# Altium PCB ЦТЕА4.324.039.PcbDoc
Units mm, origin at the board's own origin, x right, y up, seen from the top; angles counter-clockwise.
Board outline 257.3 x 114.8 mm, 4 copper layers (Top Layer, Mid-Layer 1, Internal Plane 1, Bottom Layer); 126 components, 114 nets, 540 pads, 119 vias.
Unrouted connection lines stored in the file: 21.
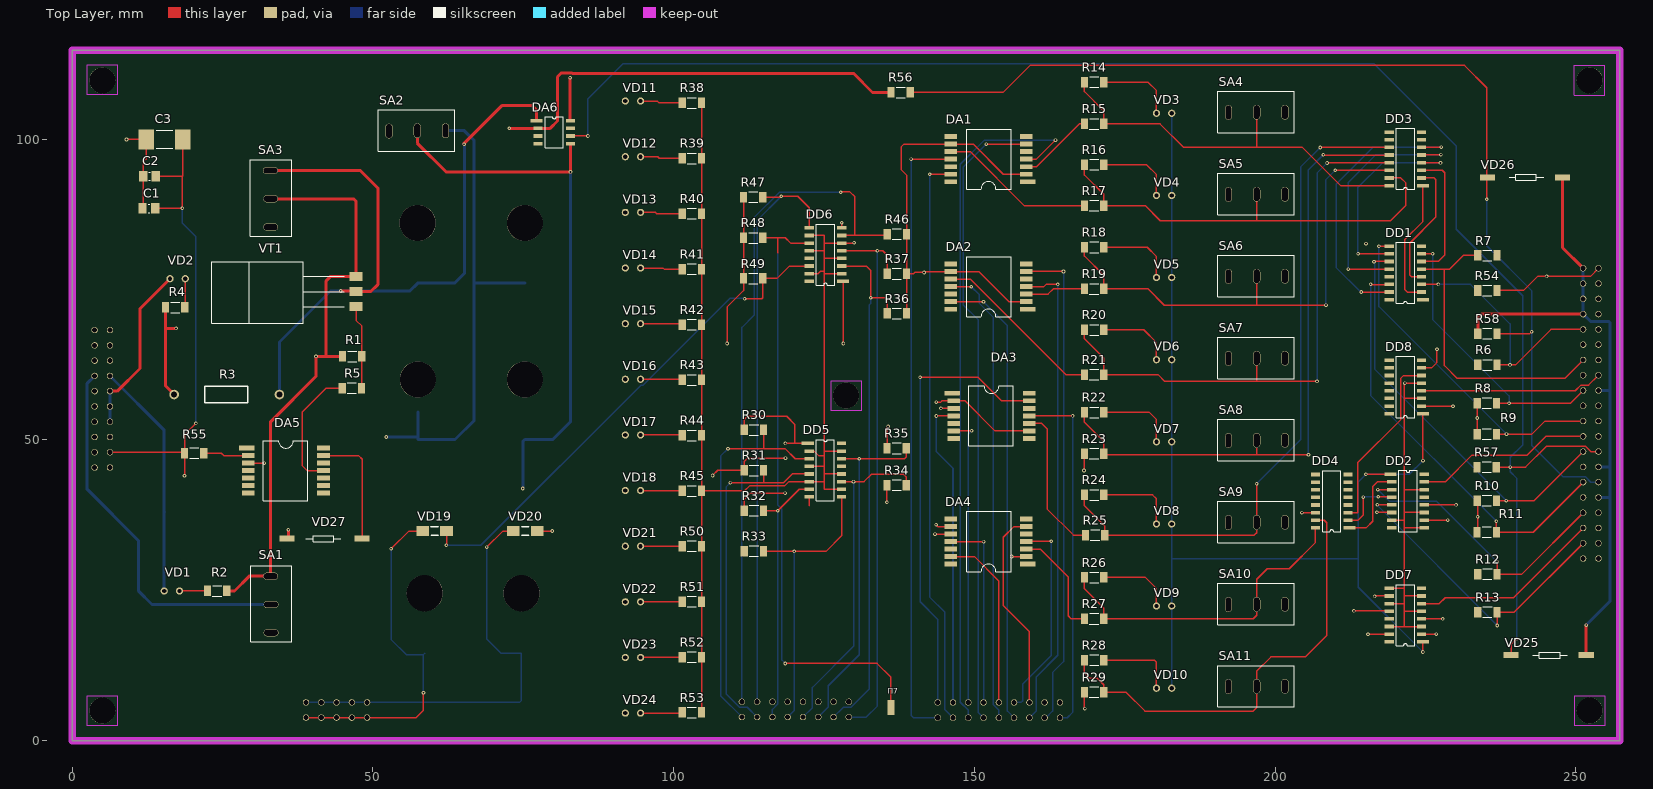
[diagram p0: Top Layer view]
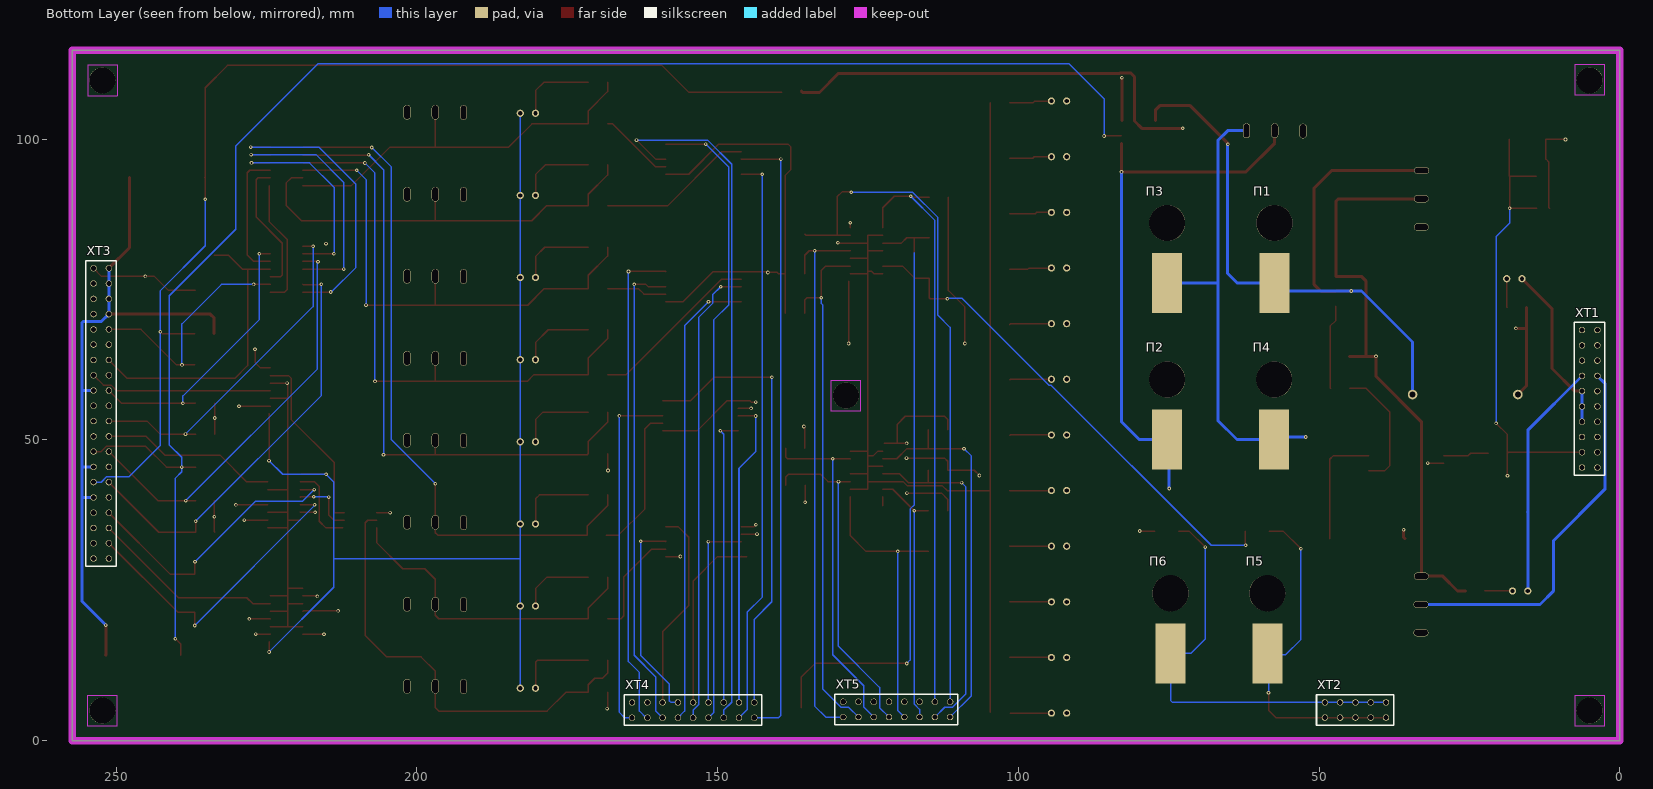
[diagram p1: Bottom Layer view, seen from below]
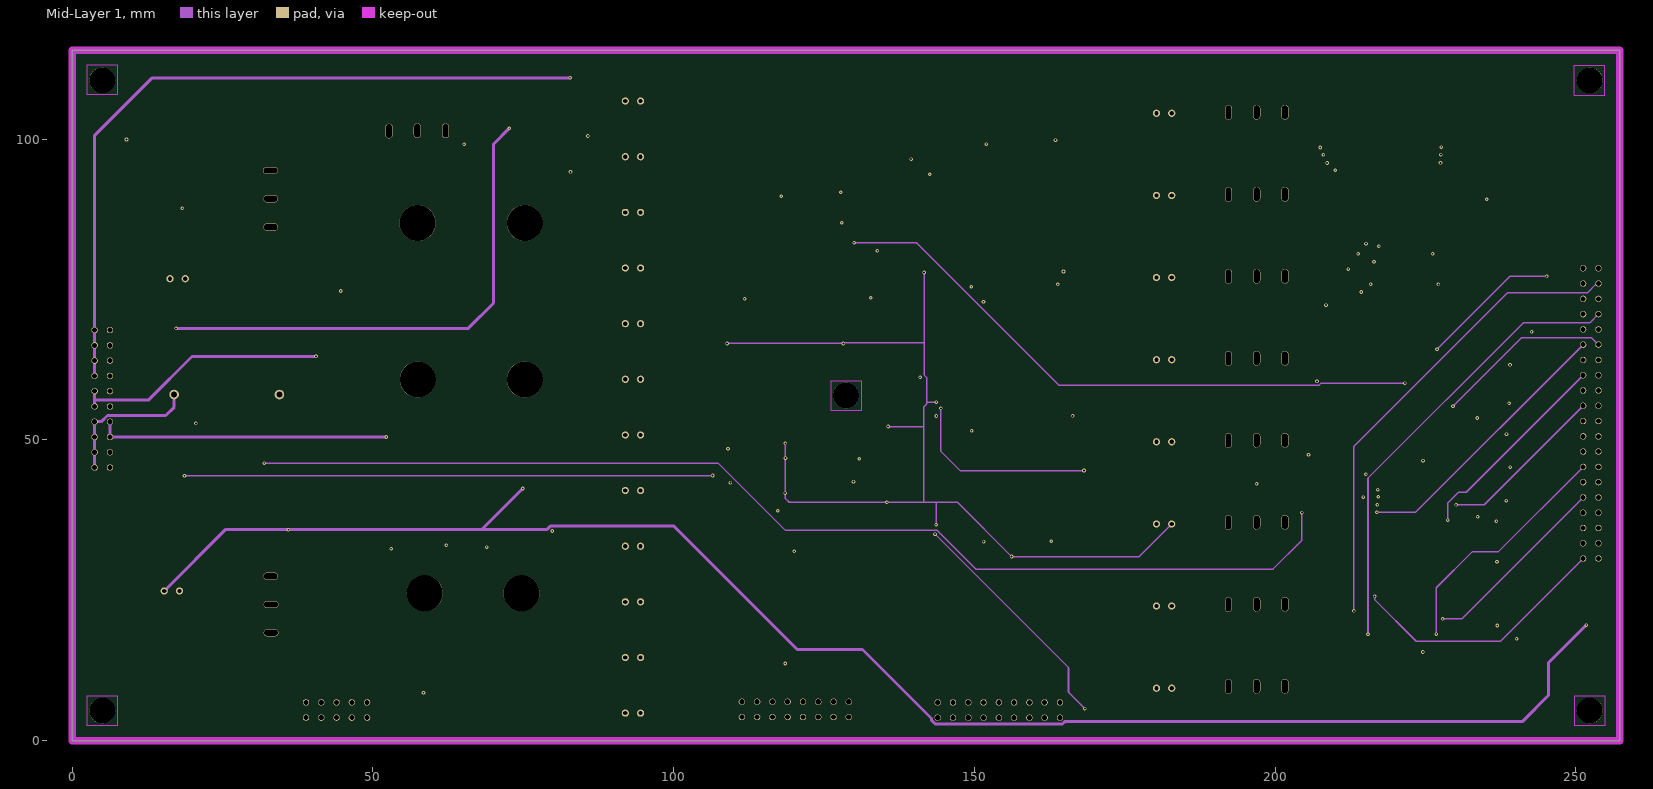
[diagram p2: Mid-Layer 1]
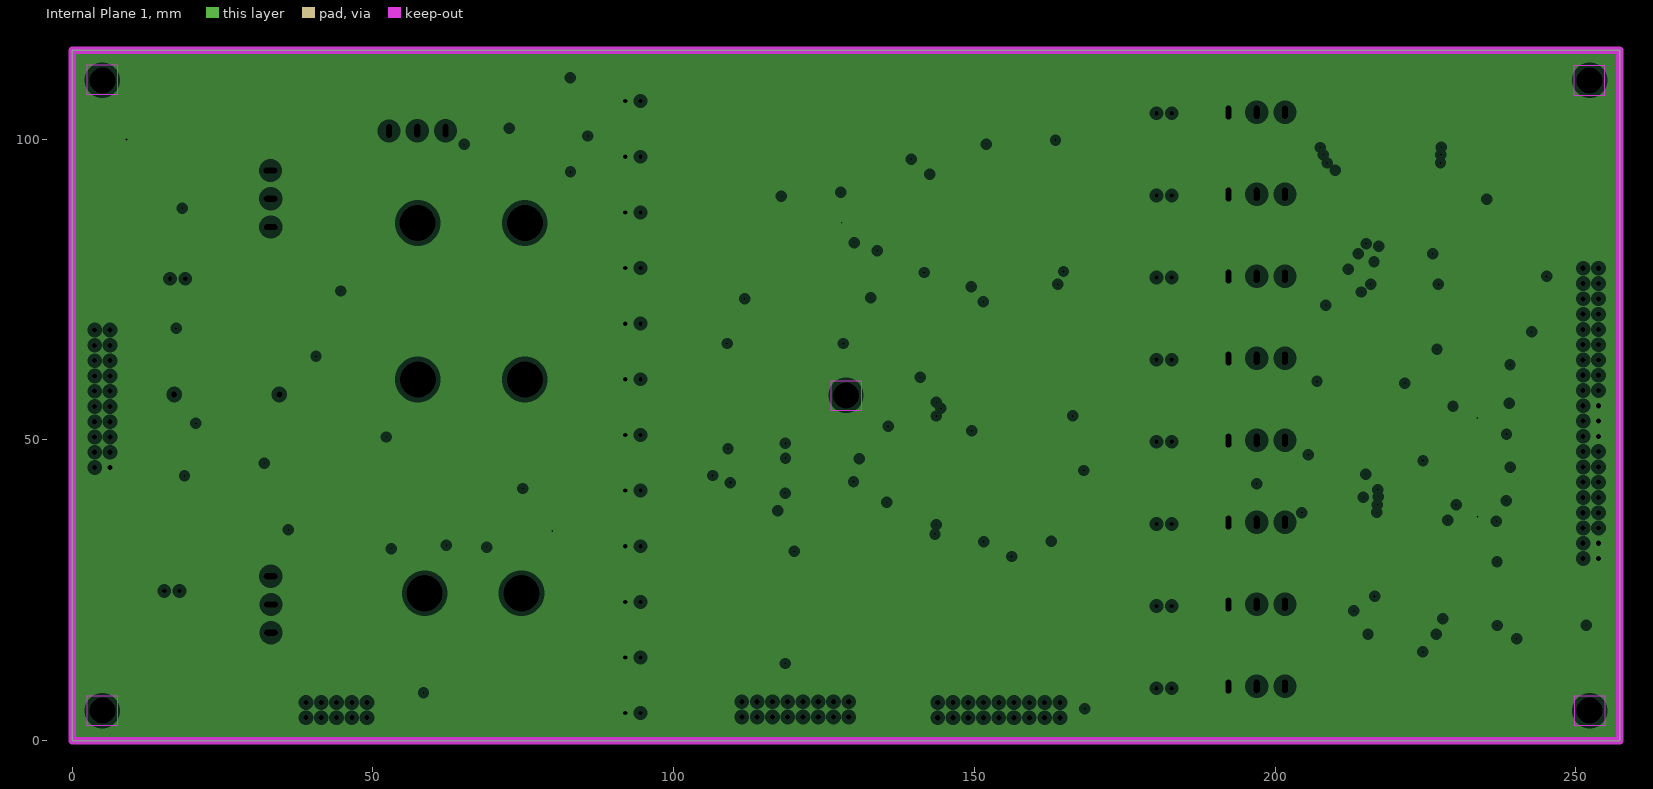
[diagram p3: Internal Plane 1, clearances drawn from the general rule]

## Layer stack, top to bottom
Top Layer: signal copper 0.0356
Dielectric: core 0.32, FR-4, Dk 4.8
Mid-Layer 1: signal copper 0.0356
Dielectric: prepreg 0.32, FR-4, Dk 4.8
Internal Plane 1: plane copper 0.0356, net GND
Dielectric: core 0.32, FR-4, Dk 4.8
Bottom Layer: signal copper 0.0356

## Board outline
0,114.8 0,0 257.3,0 257.3,114.8

## Design rules (kind name [scope] priority, off if disabled: settings)
Clearance [All] p1: gap=0.25
Height [All] p1: minheight=0 maxheight=60 prefheight=12.7
HoleSize [All] p1: absolutevalues=TRUE maxlimit=6 minlimit=0.025 maxpercent=80.000 minpercent=20.000
PlaneClearance [All] p1: clearance=0.8
PlaneConnect [All] p1: planeconnectstyle=Relief reliefexpansion=0.508 reliefentries=4 reliefconductorwidth=0.6 reliefairgap=0.254
PolygonConnect [All] p1: connectstyle=Relief reliefconductorwidth=0.254 reliefentries=4 polygonreliefangle="90 Angle"
RoutingVias [All] p1: holewidth=0.3 width=0.6 viastyle="Through Hole" minholewidth=0.3 minwidth=0.6 maxholewidth=0.3 maxwidth=0.6
SMDNeckDown [All] p1: percent=50.000
SMDToCorner [All] p1: distance=787402
SilkscreenOverComponentPads [All] p1: minsilkscreentomaskgap=0.254
SolderMaskExpansion [All] p1: expansion=0.102
Width +(-)27B [InNetClass('+(-)27В')] p1: maxlimit=0.5 minlimit=0.5 preferedwidth=0.5
Width [All] p2: maxlimit=0.25 minlimit=0.25 preferedwidth=0.25
23 further rules are at their usual default settings.

## Classes and differential pairs
component class ЦТЕА4.324.039_Э3_2: DA1 DA2 DA4 DD1 DD3 DD4 R6 R7 R8 R9 R10 R11 R12 R13 R14 R15 R16 R17 R18 R19 R20 R21 R22 R23 R24 R25 R26 R27 R28 R29 SA4 SA5 SA6 SA7 SA8 SA9 SA10 SA11 VD3 VD4 VD5 VD6 VD7 VD8 VD9 VD10 XT4
component class ЦТЕА4.324.039_Э3_1: C1 C2 C3 R1 R2 R3 R4 R5 SA1 SA2 SA3 VD1 VD2 VT1 XT1 XT2 П1 П2 П3 П4 П5 П6
component class ЦТЕА4.324.039_Э3_3: DA5 DA6 DD5 DD6 DD7 DD8 R30 R31 R32 R33 R34 R35 R36 R37 R38 R39 R40 R41 R42 R43 R44 R45 R46 R47 R48 R49 R50 R51 R52 R53 R54 R55 R56 R57 R58 VD11 VD12 VD13 VD14 VD15 VD16 VD17 VD18 VD19 VD20 VD21 VD22 VD23 VD24 VD25 VD26 VD27 XT3 XT5 П7
net class +(-)27В: +27В +27В_кам_RS+ +27В_кам_RS- +27В_пульт -27В -27В_камера

## Components (designator, comment, footprint, x,y, rotation, side; value= is the part's Value field where it differs from the comment)
C1 "1uF" GRM21BR61E105KA01K 12.727,88.519 r0 top
C2 "1uF" GRM21BR61E105KA01K 12.855,93.855 r0 top
C3 "47uF" TAJV686MO35RNJ 15.327,99.972 r180 top
DA1 "249КП1С" 249KP1S-44_3208_125_12 152.465,96.697 r180 top
DA2 "249КП1С" 249KP1S-44_3208_125_12 152.465,75.502 r180 top
DA3 "249КП1С" 249KP1S-44_3208_125_12 152.715,54.01 r0 top
DA4 "249КП1С" 249KP1S-44_3208_125_12 152.465,33.111 r180 top
DA5 "249КП1С" 249KP1S-44_3208_125_12 35.389,44.915 r0 top
DA6 "MAX4172" MAX4172 80.035,101.183 r0 top
DD1 "Mikroshema" CD4050BD 221.764,77.781 r180 top
DD2 "Mikroshema" CD4050BD 221.989,39.852 r0 top
DD3 "Mikroshema" UL2004AD 221.764,96.745 r180 top
DD4 "Mikroshema" UL2004AD 209.524,39.824 r180 top
DD5 "CD4049" CD4049UBD 125.102,44.984 r0 top
DD6 "CD4049" CD4049UBD 125.353,80.83 r180 top
DD7 "Mikroshema" CD4050BD 221.764,20.887 r180 top
DD8 "Mikroshema" CD4050BD 221.764,58.816 r180 top
R1 "Res" CR1206-JW-8250ELF 44.951,63.893 r0 top
R2 "Res" CR1206-JW-4701ELF 25.681,24.894 r180 top
R3 "Res" KNP100JTB0R1-1_0000_175 16.942,57.56 r0 top
R4 "Res" CR1206-JW-4701ELF 15.503,72.04 r0 top
R5 "Res" CR1206-JW-1001ELF 48.09,58.618 r180 top
R6 "Res" CR1206-JW-3301ELF 233.706,62.481 r0 top
R7 "Res" CR1206-JW-3301ELF 236.907,80.678 r180 top
R8 "Res" CR1206-JW-3301ELF 233.617,56.119 r0 top
R9 "Res" CR1206-JW-3301ELF 233.6,50.98 r0 top
R10 "Res" CR1206-JW-3301ELF 233.61,39.921 r0 top
R11 "Res" CR1206-JW-3301ELF 233.586,34.667 r0 top
R12 "Res" CR1206-JW-3301ELF 233.709,27.712 r0 top
R13 "Res" CR1206-JW-3301ELF 233.709,21.377 r0 top
R14 "Res" CR1206-JW-4700ELF 168.292,109.498 r0 top
R15 "Res" CR1206-JW-3300ELF 171.492,102.551 r180 top
R16 "Res" CR1206-JW-4700ELF 168.292,95.771 r0 top
R17 "Res" CR1206-JW-3300ELF 171.492,88.974 r180 top
R18 "Res" CR1206-JW-4700ELF 168.292,82.045 r0 top
R19 "Res" CR1206-JW-3300ELF 171.492,75.132 r180 top
R20 "Res" CR1206-JW-4700ELF 168.292,68.319 r0 top
R21 "Res" CR1206-JW-3300ELF 171.492,60.876 r180 top
R22 "Res" CR1206-JW-4700ELF 168.292,54.593 r0 top
R23 "Res" CR1206-JW-3300ELF 171.492,47.73 r180 top
R24 "Res" CR1206-JW-4700ELF 168.292,40.868 r0 top
R25 "Res" CR1206-JW-3300ELF 171.673,34.18 r180 top
R26 "Res" CR1206-JW-4700ELF 168.292,27.14 r0 top
R27 "Res" CR1206-JW-3300ELF 171.492,20.277 r180 top
R28 "Res" CR1206-JW-4700ELF 168.292,13.414 r0 top
R29 "Res" CR1206-JW-3300ELF 171.492,8.069 r180 top
R30 "Res" CR1206-JW-3301ELF 111.738,51.692 r0 top
R31 "Res" CR1206-JW-3301ELF 111.738,44.966 r0 top
R32 "Res" CR1206-JW-3301ELF 111.738,38.24 r0 top
R33 "Res" CR1206-JW-3301ELF 111.738,31.514 r0 top
R34 "Res" CR1206-JW-3301ELF 135.471,42.506 r0 top
R35 "Res" CR1206-JW-3301ELF 135.471,48.626 r0 top
R36 "Res" CR1206-JW-3301ELF 138.717,71.038 r180 top
R37 "Res" CR1206-JW-3301ELF 138.717,77.639 r180 top
R38 "Res" CR1206-JW-4700ELF 104.628,106.051 r180 top
R39 "Res" CR1206-JW-4700ELF 104.628,96.837 r180 top
R40 "Res" CR1206-JW-4700ELF 104.628,87.623 r180 top
R41 "Res" CR1206-JW-4700ELF 104.628,78.409 r180 top
R42 "Res" CR1206-JW-4700ELF 104.628,69.194 r180 top
R43 "Res" CR1206-JW-4700ELF 104.628,59.98 r180 top
R44 "Res" CR1206-JW-4700ELF 104.628,50.766 r180 top
R45 "Res" CR1206-JW-4700ELF 104.628,41.552 r180 top
R46 "Res" CR1206-JW-3301ELF 138.717,84.24 r180 top
R47 "Res" CR1206-JW-3301ELF 111.616,90.388 r0 top
R48 "Res" CR1206-JW-3301ELF 111.616,83.622 r0 top
R49 "Res" CR1206-JW-3301ELF 111.616,76.856 r0 top
R50 "Res" CR1206-JW-4700ELF 104.628,32.337 r180 top
R51 "Res" CR1206-JW-4700ELF 104.628,23.123 r180 top
R52 "Res" CR1206-JW-4700ELF 104.628,13.909 r180 top
R53 "Res" CR1206-JW-4700ELF 104.628,4.695 r180 top
R54 "Res" CR1206-JW-4701ELF 236.889,74.857 r180 top
R55 "Res" CR1206-JW-3300ELF 18.677,47.811 r0 top
R56 "Res" CR1206-JW-4701ELF 136.147,107.795 r0 top
R57 "Res" CR1206-JW-1001ELF 233.584,45.497 r0 top
R58 "Res" CR1206-JW-4700ELF 236.909,67.701 r180 top
SA1 "\"Питание пульта\"" 7107SYZQE 33.049,17.953 r0 top
SA2 "\"Измерение тока\"" 7107SYZQE 62.062,101.423 r90 top
SA3 "\"Питание камеры\"" 7107SYZQE 32.993,85.402 r0 top
SA4 "\"1\"" 7107SYZQE 201.635,104.501 r90 top
SA5 "\"2\"" 7107SYZQE 201.635,90.864 r90 top
SA6 "\"3\"" 7107SYZQE 201.635,77.227 r90 top
SA7 "\"4\"" 7107SYZQE 201.635,63.59 r90 top
SA8 "\"5\"" 7107SYZQE 201.635,49.953 r90 top
SA9 "\"6\"" 7107SYZQE 201.635,36.316 r90 top
SA10 "\"7\"" 7107SYZQE 201.635,22.679 r90 top
SA11 "\"8\"" 7107SYZQE 201.635,9.041 r90 top
VD1 "LED" HLMP-D150 17.826,24.9 r180 top
VD2 "LED" HLMP-D150 18.788,76.813 r180 top
VD3 "\"Out1\"" HLMP-D150 182.806,104.326 r180 top
VD4 "\"Out2\"" HLMP-D150 182.806,90.668 r180 top
VD5 "\"Out3\"" HLMP-D150 182.806,77.011 r180 top
VD6 "\"Out4\"" HLMP-D150 182.806,63.354 r180 top
VD7 "\"Out5\"" HLMP-D150 182.806,49.697 r180 top
VD8 "\"Out6\"" HLMP-D150 182.806,36.04 r180 top
VD9 "\"Out7\"" HLMP-D150 182.806,22.383 r180 top
VD10 "\"Out8\"" HLMP-D150 182.806,8.726 r180 top
VD11 "\"1\"" HLMP-D150 94.499,106.35 r180 top
VD12 "\"2\"" HLMP-D150 94.499,97.098 r180 top
VD13 "\"3\"" HLMP-D150 94.499,87.847 r180 top
VD14 "\"4\"" HLMP-D150 94.499,78.595 r180 top
VD15 "\"5\"" HLMP-D150 94.499,69.344 r180 top
VD16 "\"6\"" HLMP-D150 94.499,60.092 r180 top
VD17 "\"7\"" HLMP-D150 94.499,50.841 r180 top
VD18 "\"8\"" HLMP-D150 94.499,41.589 r180 top
VD19 "Schottky" 10MQ060N 60.26,34.867 r180 top
VD20 "Schottky" 10MQ060N 75.317,34.867 r0 top
VD21 "\"9\"" HLMP-D150 94.499,32.338 r180 top
VD22 "\"10\"" HLMP-D150 94.499,23.086 r180 top
VD23 "\"11\"" HLMP-D150 94.499,13.835 r180 top
VD24 "\"КПС\"" HLMP-D150 94.499,4.583 r180 top
VD25 "9В" 1N4754A-25_0000_145_18 245.483,14.21 r180 top
VD26 "9В" 1N4754A-25_0000_145_18 241.544,93.663 r180 top
VD27 "9В" 1N4754A-25_0000_145_18 41.955,33.587 r0 top
VT1 "IRF4905PBF" IRF4905PBF-f1 47.198,72.21 r90 top
XT1 "1 +27В" PLD-20 3.726,68.277 r270 bottom
XT2 "1 КПС-1" PLD-10 38.862,3.829 r0 bottom
XT3 "1 Общ" PLD-40 251.224,78.547 r270 bottom
XT4 "1 opt_out1+" PLD-18 143.901,3.819 r0 bottom
XT5 "1 ТМ1" PLD-16 111.335,3.928 r0 bottom
П1 "\"+U_кам\"" ZMP 57.422,86.077 r180 bottom
П2 "\"-I_кам\"" ZMP 75.245,60.064 r180 bottom
П3 "\"-U_кам.\"" ZMP 75.245,86.077 r180 bottom
П4 "\"+I_кам.\"" ZMP 57.452,60.064 r180 bottom
П5 "\"КПС-1\"" ZMP 58.591,24.51 r180 bottom
П6 "\"КПС-2\"" ZMP 74.694,24.51 r180 bottom
П7 "" Pad 136.126,5.504 r0 top

## Footprints (in the part's own frame and the unit in brackets; to place one, negate y for a bottom-side part, rotate by r counter-clockwise, add the part's x,y. Pads: shape width x height; smd on the part's side, far side on the other; paste and mask are expansions set on the pad)
1N4754A-25_0000_145_18 [mm] "Диод 1N4754A. Diodes INCORPORATED.  Формовка 25.0000.145.12 по ОСТ92-9388-98.Класс точности 3"
  rect 2.5x1 smd: 1(-6.25,0) 2(6.25,0)
  silkscreen extent -3.1,-0.5 2.65,0.5
10MQ060N [mm] "Диод 10MQ060N.International Rectifier. Класс точности 3"
  rect 2.1x1.7 smd: 1(-1.975,0) 2(1.975,0)
  silkscreen extent -0.6,-0.71 0.61,0.73
249KP1S-44_3208_125_12 [mm] "Микросхема 249КП1С, 1Х3.438.000 ТУ. Формовка 44.3208.125.12 по ОСТ92-9388-98. Класс точности 3."
  rect 2.6x0.8 smd: 1(-6.375,3.75)
  rect 2.1x0.8 smd: 2(-6.125,2.5) 3(-6.125,1.25) 4(-6.125,0) 5(-6.125,-1.25) 6(-6.125,-2.5) 7(-6.125,-3.75) 8(6.375,-3.75) 9(6.375,-2.5) 10(6.375,-1.25) 11(6.375,0) 12(6.375,1.25) 13(6.375,2.5) 14(6.375,3.75)
  silkscreen extent -3.67,-5 3.77,5
7107SYZQE [mm] "Переключатель 7107SYZQE. ITT Cannon Класс точности 3"
  rrect100% 2.45x1.2 hole 0.95 slot 2.25 at 0 deg: 1(0,0) 2(0,4.7) 3(-0.05,9.4)
  silkscreen extent -3.4,-1.52 3.46,11.18
CD4049UBD [mm] "Микросхема CD4049UBDTexas Instrument. Класс точности 3."
  rect 2x0.6 smd: 1(-2.812,4.445)
  rect 1.55x0.6 smd: 2(-2.588,3.175) 3(-2.588,1.905) 4(-2.588,0.635) 5(-2.588,-0.635) 6(-2.588,-1.905) 7(-2.588,-3.175) 8(-2.588,-4.445) 9(2.813,-4.445) 10(2.813,-3.175) 11(2.813,-1.905) 12(2.813,-0.635) 13(2.813,0.635) 14(2.813,1.905) 15(2.813,3.175) 16(2.813,4.445)
  silkscreen extent -1.41,-5.08 1.61,5.08
CD4050BD [mm] "Микросхема CD4050BDTexas Instrument. Класс точности 3."
  rect 2x0.6 smd: 1(-2.813,4.445)
  rect 1.55x0.6 smd: 2(-2.588,3.175) 3(-2.588,1.905) 4(-2.588,0.635) 5(-2.588,-0.635) 6(-2.588,-1.905) 7(-2.588,-3.175) 8(-2.588,-4.445) 9(2.812,-4.445) 10(2.812,-3.175) 11(2.812,-1.905) 12(2.812,-0.635) 13(2.812,0.635) 14(2.812,1.905) 15(2.812,3.175) 16(2.812,4.445)
  silkscreen extent -1.41,-5.08 1.61,5.08
CR1206-JW-1001ELF [mm] "Резистор CR1206-JW-1001ELF. Bourns. Класс точности 3"
  rect 1.2x1.75 smd: 1(0,0) 2(3.2,0)
  silkscreen extent 0.85,-0.88 2.38,0.87
CR1206-JW-3300ELF [mm] "Резистор CR1206-JW-3300ELF. Bourns. Класс точности 3"
  rect 1.2x1.75 smd: 1(0,0) 2(3.2,0)
  silkscreen extent 0.85,-0.87 2.38,0.88
CR1206-JW-3301ELF [mm] "Резистор CR1206-JW-3301ELF. Bourns. Класс точности 3"
  rect 1.2x1.75 smd: 1(0,0) 2(3.2,0)
  silkscreen extent 0.85,-0.87 2.37,0.88
CR1206-JW-4700ELF [mm] "Резистор CR1206-JW-4700ELF. Bourns. Класс точности 3"
  rect 1.2x1.75 smd: 1(0,0) 2(3.2,0)
  silkscreen extent 0.85,-0.87 2.37,0.87
CR1206-JW-4701ELF [mm] "Резистор CR1206-JW-4701ELF. Bourns. Класс точности 3"
  rect 1.2x1.75 smd: 1(0,0) 2(3.2,0)
  silkscreen extent 0.85,-0.87 2.37,0.88
CR1206-JW-8250ELF [mm] "Резистор CR1206-JW-8250ELF. Bourns. Класс точности 3"
  rect 1.2x1.75 smd: 1(0,0) 2(3.2,0)
  silkscreen extent 0.85,-0.88 2.38,0.87
GRM21BR61E105KA01K [mm] "Конденсатор GRM21BR61E105KA01K. MURATA. Класс точности 3."
  rect 1.4x1.8 smd: 1(-1.05,0) 2(1.05,0)
  silkscreen extent -0.13,-0.7 0.15,0.68
HLMP-D150 [mm] "Светодиод HLMP-D150. Avago TECHNOLOGIES. Класс точноти 3"
  round 1.2 hole 0.7: 1(0,0) 2(2.54,0)
IRF4905PBF-f1 [mm] "Транзистор IRF 4905 PBF, ПАКБ 432149.017ТУ. Формовка по чертежу, класс точности 3"
  rect 1.5x2.2 smd: 1(0,0) 2(2.5,0) 3(5,0)
  silkscreen extent -2.83,1.95 7.45,23.98
KNP100JTB0R1-1_0000_175 [mm] "Резистор KNP100JTB0R1 Hitano Enterprise. Формовка 1.0000.175по ОСТ92-9388-98.Класс точности 3"
  round 1.6 hole 1: 1(0,0) 2(17.5,0)
  silkscreen extent 5.1,-1.35 12.27,1.35
MAX4172 [mm] "Микросхема MAX4172 Класс точности 3."
  rect 2x0.6 smd: 1(-2.812,1.905)
  rect 1.55x0.6 smd: 2(-2.587,0.635) 3(-2.587,-0.635) 4(-2.587,-1.905) 5(2.813,-1.905) 6(2.813,-0.635) 7(2.813,0.635) 8(2.813,1.905)
  silkscreen extent -1.41,-2.62 1.61,2.54
Pad [mm] "контактная площадка. Класс точности 3"
  rect 1.1x2.5 smd: 1(0,0)
PLD-10 [mm] "Разьем штырьевой PLD-10.Connfly electronic. Класс точности 3."
  round 1.05 hole 0.85: 1(0,0) 2(2.54,0) 3(5.08,0) 4(7.62,0) 5(10.16,0) 6(0,-2.54) 7(2.54,-2.54) 8(5.08,-2.54) 9(7.62,-2.54) 10(10.16,-2.54)
  silkscreen extent -1.27,-3.81 11.56,1.27
PLD-16 [mm] "разьем штырьевой PLD-16. Connfly electronic. Класс точности 3"
  round 1.05 hole 0.85: 1(0,0) 2(2.54,0) 3(5.08,0) 4(7.62,0) 5(10.16,0) 6(12.7,0) 7(15.24,0) 8(17.78,0) 9(0,-2.54) 10(2.54,-2.54) 11(5.08,-2.54) 12(7.62,-2.54) 13(10.16,-2.54) 14(12.7,-2.54) 15(15.24,-2.54) 16(17.78,-2.54)
  silkscreen extent -1.27,-3.81 19.18,1.27
PLD-18 [mm] "Разьем штырьевой PLD-18. Connfly electronic. Класс точности 3."
  round 1.05 hole 0.85: 1(0,0) 2(2.54,0) 3(5.08,0) 4(7.62,0) 5(10.16,0) 6(12.7,0) 7(15.24,0) 8(17.78,0) 9(20.32,0) 10(0,-2.54) 11(2.54,-2.54) 12(5.08,-2.54) 13(7.62,-2.54) 14(10.16,-2.54) 15(12.7,-2.54) 16(15.24,-2.54) 17(17.78,-2.54) 18(20.32,-2.54)
  silkscreen extent -1.27,-3.81 21.59,1.27
PLD-20 [mm] "Разьем штырьевой PLD-20.Connfly electronic. Класс точности 3."
  round 1.05 hole 0.85: 1(0,0) 2(2.54,0) 3(5.08,0) 4(7.62,0) 5(10.16,0) 6(12.7,0) 7(15.24,0) 8(17.78,0) 9(20.32,0) 10(22.86,0) 11(0,-2.54) 12(2.54,-2.54) 13(5.08,-2.54) 14(7.62,-2.54) 15(10.16,-2.54) 16(12.7,-2.54) 17(15.24,-2.54) 18(17.78,-2.54) 19(20.32,-2.54) 20(22.86,-2.54)
  silkscreen extent -1.27,-3.81 24.13,1.27
PLD-40 [mm] "Разьем штырьевой PLD-40.Connfly electronic. Класс точности 3."
  round 1.05 hole 0.85: 1(0,0) 2(2.54,0) 3(5.08,0) 4(7.62,0) 5(10.16,0) 6(12.7,0) 7(15.24,0) 8(17.78,0) 9(20.32,0) 10(22.86,0) 12(27.94,0) 13(30.48,0) 14(33.02,0) 15(35.56,0) 16(38.1,0) 17(40.64,0) 18(43.18,0) 19(45.72,0) 20(48.26,0) 21(0,-2.54) 22(2.54,-2.54) 23(5.08,-2.54) 24(7.62,-2.54) 25(10.16,-2.54) 26(12.7,-2.54) 27(15.24,-2.54) 28(17.78,-2.54) 29(20.32,-2.54) 30(22.86,-2.54) 31(25.4,-2.54) 32(27.94,-2.54) 33(30.48,-2.54) 34(33.02,-2.54) 35(35.56,-2.54) 36(38.1,-2.54) 37(40.64,-2.54) 38(43.18,-2.54) 39(45.72,-2.54) 40(48.26,-2.54)
  round 1.05 hole 0.85 unplated: 11(25.4,0)
  silkscreen extent -1.27,-3.81 49.53,1.27
TAJV686MO35RNJ [mm] "Конденсатор TAJV686MO35RNJ.AVX. Класс точности 3."
  rect 2.6x3.3 smd: 1(-3.05,0) 2(3.05,0)
  silkscreen extent -1.35,-1.5 1.33,1.5
UL2004AD [mm] "Микросхема UL2004AD Класс точности 3."
  rect 2x0.6 smd: 1(-2.813,4.445)
  rect 1.55x0.6 smd: 2(-2.588,3.175) 3(-2.588,1.905) 4(-2.588,0.635) 5(-2.588,-0.635) 6(-2.588,-1.905) 7(-2.588,-3.175) 8(-2.588,-4.445) 9(2.812,-4.445) 10(2.812,-3.175) 11(2.812,-1.905) 12(2.812,-0.635) 13(2.812,0.635) 14(2.812,1.905) 15(2.812,3.175) 16(2.812,4.445)
  silkscreen extent -1.41,-5.08 1.61,5.08
ZMP [mm] "Зажим малогабаритный ЗМП, ГА0.483.000 ТУ. Класс точности 3."
  rect 5x10 smd: 1(0,-10)
  round 6 hole 6: 2(0,0)

## Part data
C1 C2 C3: library part Condensator
DA1 DA2 DA3 DA4 DA5: library part Microshema
DD1 DD2 DD7 DD8: "CD4050BD"
DD3 DD4: "ULN2004"
DD5 DD6: library part Mikroshema
R1 R2 R3 R4 R5 R6 R7 R8 R9 R10 R11 R12 R13 R14 R15 R16 R17 R18 R19 R20 R21 R22 R23 R24 R25 R26 R27 R28 R29 R30 R31 R32 R33 R34 R35 R36 R37 R38 R39 R40 R41 R42 R43 R44 R45 R46 R47 R48 R49 R50 R51 R52 R53 R54 R55 R56 R57 R58: library part Rezistor
SA1 SA2 SA3 SA4 SA5 SA6 SA7 SA8 SA9 SA10 SA11: library part Perekljuchatel
VD1 VD2 VD3 VD4 VD5 VD6 VD7 VD8 VD9 VD10 VD11 VD12 VD13 VD14 VD15 VD16 VD17 VD18 VD21 VD22 VD23 VD24: library part Svetodiod
VD19 VD20: library part Diod
VD25 VD26 VD27: library part Diod, "zener"
VT1: library part MOSFET-P, "MOSFET"
XT1 XT2 XT3 XT4: library part "Razem shtyrevoj"
XT5: library part "Razem shtyrevoj", "PLD16"
П1 П2 П3 П4 П5 П6: library part "Zazhim malogobaritnyj", "pad_ЗМП"
П7: library part Pad, "pad"

## Free pads (board coordinates)
  round 4.3 hole 4.3: 1(5,5) 1(5,109.8) 1(128.65,57.4) 1(252.3,5) 1(252.3,109.8)

## Via types
v1: diameter 0.6, hole 0.3, Top Layer to Bottom Layer, 119 vias

## Nets (pads, with @x,y where several pads share a name; then routed paths per layer and width w, separated by ;. In a path a pad name is that pad's centre, name@x,y a point inside that pad or via, vN(x,y) a via of type N, cw(c..) or ccw(c..) an arc to the next point about the centre after c; other vN are vias at no path point)
+5V: C1.2 C2.2 C3.1 DA1.2 DA1.9 DA2.2 DA2.9 DA3.2 DA3.9 DA4.2 DA4.9 DD1.1 DD2.1 DD5.1 DD6.1 DD7.1 DD8.1 R30.1 R31.1 R32.1 R33.1 R34.1 R35.1 R36.1 R37.1 R46.1 R47.1 R48.1 R49.1 R55.1 VD3.1 VD4.1 VD5.1 VD6.1 VD7.1 VD8.1 VD9.1 VD10.1 XT1.19 | length 693.8
  Top Layer w0.25: XT1.19 18.532,47.957 R55.1 ; C1.2 v1(18.319,88.519) 18.319,93.855 ; C2.2 18.319,93.855 ; C3.1 18.377,93.913 18.319,93.855 ; v1(18.663,44.066) 18.677,44.08 R55.1 ; v1(20.55,52.766) 18.677,50.894 R55.1 ; v1(106.464,44.091) 107.339,44.966 R31.1 111.738,46.458 112.264,46.984 v1(118.587,46.984) ; v1(108.875,66.046) 108.875,72.103 111.616,74.843 R49.1 R48.1 R47.1 ; R32.1 111.738,40.11 112.79,41.162 v1(118.532,41.162) ; R30.1 111.738,53.422 112.255,53.939 118.781,53.939 120.133,52.587 120.133,49.439 ; v1(118.577,49.439) 120.133,49.439 ; DD5.1 122.279,49.439 120.133,49.439 ; DD6.1 128.165,66.106 v1(128.225,66.046) ; v1(135.446,39.636) R34.1@135.446,42.482 ; R35.1 135.471,52.075 v1(135.648,52.252) ; R36.1 R37.1 ; v1(143.627,35.893) 143.909,35.611 DA4.9 ; v1(143.644,56.296) 144.439,56.296 144.653,56.51 DA3.2 148.444,56.51 153.444,51.51 DA3.9 ; v1(156.183,30.626) 156.173,30.617 156.173,30.611 DA4.2 ; DA2.2 155.73,73.002 150.73,78.002 DA2.9 141.777,78.002 v1(141.63,77.854) 140.098,77.854 139.883,77.639 R37.1 ; DA1.2 154.798,94.197 149.798,99.197 DA1.9 138.284,99.197 137.805,98.718 137.805,94.966 138.717,94.055 R46.1 R37.1 ; v1(215.09,44.298) DD2.1 DD2.1 ; v1(224.576,14.756) DD7.1 ; DD8.1 224.584,54.364 v1(224.584,46.565)
  Mid-Layer 1 w0.25: v1(18.663,44.066) 106.439,44.066 v1(106.464,44.091) ; v1(108.875,66.046) v1(128.225,66.046) 128.225,66.156 141.63,66.156 ; v1(118.532,41.162) v1@118.577,41.162 ; v1(118.577,49.439) v1@118.577,46.984 ; v1(118.587,46.984) v1@118.577,46.984 ; v1(135.648,52.252) 135.735,52.165 141.555,52.165 ; v1(141.63,77.854) 141.63,66.156 ; v1(143.627,35.893) 143.627,39.61 143.686,39.668 ; v1(143.644,56.296) 142.038,56.296 ; VD8.1 177.392,30.626 v1(156.183,30.626) 147.141,39.668 143.686,39.668 ; v1@118.577,41.162 v1@118.577,46.984 ; v1@118.577,41.162 118.577,40.263 119.204,39.636 v1(135.446,39.636) 135.479,39.668 141.555,39.668 ; 141.555,39.668 143.686,39.668 ; 141.555,39.668 141.555,52.165 ; 141.555,52.165 141.555,55.452 142.038,55.935 142.038,56.296 ; 141.63,66.156 141.63,60.819 142.038,60.411 142.038,56.296
  Bottom Layer w0.25: v1(18.319,88.519) 18.319,86.024 20.55,83.793 v1(20.55,52.766) ; VD10.1 VD9.1 182.806,30.23 ; VD3.1 VD4.1 VD5.1 VD6.1 VD7.1 VD8.1 182.806,30.23 ; 213.816,30.23 213.811,30.23 ; v1(224.576,14.756) 213.811,25.521 213.811,30.23 ; v1(224.584,46.565) 222.317,44.298 v1(215.09,44.298) 213.811,43.019 213.811,30.23 ; 182.806,30.23 213.811,30.23
+27В: DA6.8 SA1.2 XT1.1 XT1.2 XT1.3 XT1.4 | length 192.9
  Top Layer w0.5: DA6.8@82.775,103.125 v1(82.775,110.229)
  Mid-Layer 1 w0.5: XT1.4 XT1.3 XT1.2 XT1.1 3.726,100.654 13.301,110.229 v1(82.775,110.229) ; SA1.2@33.034,22.653 SA1.2
  Bottom Layer w0.5: XT1.4 2.484,59.415 2.484,41.801 10.985,33.3 10.985,24.936 13.268,22.653 SA1.2
+27В_кам_RS+: DA6.1 R3.2 SA3.3 VT1.2 П1.1 | length 124.2
  Top Layer w0.5: SA3.3 47.888,94.802 50.797,91.893 50.797,75.832 49.675,74.71 VT1.2 ; v1(44.646,74.771) VT1.2@47.138,74.771 ; v1@65.073,99.236 71.422,105.585 76.469,105.585 77.222,104.832 DA6.1
  Bottom Layer w0.5: R3.2 34.442,66.292 42.921,74.771 v1(44.646,74.771) 56.116,74.771 П1.1 63.568,76.077 65.181,77.69 v1@65.181,99.164
  other v1: 65.144,99.164
+27В_кам_RS-: DA6.2 R3.1 R4.1 R56.1 XT1.7 XT1.8 XT1.9 XT1.10 | length 198.4
  Top Layer w0.5: R4.1 15.503,68.562 ; R3.1 15.503,58.999 15.503,68.562 ; v1(17.27,68.562) 15.503,68.562 ; v1(72.664,101.826) 77.44,101.826 DA6.2 79.463,101.818 80.666,103.021 80.666,110.39 81.304,111.029 83.106,111.029 83.166,110.969 129.89,110.969 133.065,107.794 135.877,107.794 R56.1@136.087,108.004
  Mid-Layer 1 w0.5: XT1.10 XT1.9 XT1.8 XT1.7 4.817,53.037 5.842,54.062 15.54,54.062 16.942,55.463 R3.1 ; v1(17.27,68.562) 65.843,68.562 70.029,72.748 70.029,99.191 v1(72.664,101.826)
+27В_пульт: R1.1 R2.1 SA1.3 SA3.2 VT1.3 XT1.5 XT1.6 | length 139.7
  Top Layer w0.5: XT1.6@3.726,55.584 XT1.6@3.73,55.58 ; R2.1 26.965,24.894 29.424,27.353 SA1.3 32.999,53.051 40.528,60.581 v1(40.528,63.897) 40.532,63.893 R1.1 ; SA3.2 46.76,90.102 47.198,89.664 VT1.3 42.961,77.21 42.213,76.463 42.213,63.927
  Mid-Layer 1 w0.5: XT1.6@3.726,55.584 XT1.5 XT1.5@4.001,58.117 ; 3.742,56.624 12.645,56.624 19.919,63.897 v1(40.528,63.897)
-27В: DA6.5 R57.1 R58.2 SA2.2 VD1.2 VD25.1 VD26.1 VD27.1 XT1.11 XT1.12 XT1.13 XT1.14 XT3.1 XT3.2 XT3.3 XT3.4 XT3.29 XT3.34 XT3.36 П2.1 | length 520.6
  Top Layer w0.5: VD27.1 35.939,33.821 v1(35.939,35.074) ; SA2.2 57.362,99.361 62.143,94.579 v1(82.847,94.579) DA6.5 ; R58.2 233.709,70.292 234.344,70.927 XT3.4 ; VD26.1 247.794,81.977 XT3.1 ; v1(251.722,19.224) 251.722,14.221 VD25.1
  Mid-Layer 1 w0.5: VD1.2 25.537,35.151 68.125,35.151 ; v1(74.913,41.939) 68.125,35.151 ; v1(251.722,19.224) 245.488,12.99 245.488,7.581 241.078,3.171 165.023,3.171 164.646,2.794 143.476,2.794 142.876,3.394 142.876,3.71 131.411,15.175 120.55,15.175 100.058,35.667 79.486,35.667 78.97,35.151 68.125,35.151
  Bottom Layer w0.5: XT1.14 15.286,51.637 15.286,37.981 ; VD1.2 15.286,37.981 ; 15.35,38.045 15.286,37.981 ; v1(74.913,41.939) 74.913,49.732 П2.1 79.89,50.064 82.847,53.021 v1(82.847,94.579) ; XT3.1 XT3.2 XT3.3 XT3.4 252.429,69.722 255.433,69.722 255.71,69.445 255.71,23.213 v1(251.722,19.224) ; XT3.36 255.664,40.447 ; XT3.34 255.694,45.527 ; XT3.29 255.658,58.227
-27В_камера: SA2.1 VD2.2 XT1.15 XT1.16 XT1.17 XT1.18 П3.1 П4.1 | length 158.2
  Top Layer w0.5: XT1.15 7.469,58.117 11.258,61.905 11.258,71.823 VD2.2
  Mid-Layer 1 w0.5: XT1.17 XT1.18 52.196,50.497 v1(52.201,50.492)
  Bottom Layer w0.5: XT1.17 XT1.16 XT1.15 ; v1(52.201,50.492) 57.264,50.492 П4.1@57.452,50.68 ; П4.1@57.452,54.681 П4.1@57.452,50.68 ; SA2.1 65.194,101.423 66.834,99.783 66.834,75.981 ; П3.1 66.93,76.077 66.834,75.981 ; П4.1@57.452,50.68 П4.1 63.654,50.064 66.834,53.244 66.834,75.981
CAM_POWER: DA5.11 R5.2 | length 21.1
  Top Layer w0.25: DA5.11 39.05,44.915 38.273,45.691 38.273,54.705 42.186,58.618 R5.2
GND: C1.1 C2.1 C3.2 DD1.8 DD2.8 DD3.8 DD4.8 DD5.8 DD6.8 DD7.8 DD8.8 R6.1 R7.1 R8.1 R9.1 R10.1 R11.1 R12.1 R13.1 R54.2 SA4.3 SA5.3 SA6.3 SA7.3 SA8.3 SA9.3 SA10.3 SA11.3 VD11.2 VD12.2 VD13.2 VD14.2 VD15.2 VD16.2 VD17.2 VD18.2 VD20.2 VD21.2 VD22.2 VD23.2 VD24.2 XT1.20 XT3.30 XT3.31 XT3.32 XT3.39 XT3.40 | length 30.4
  Top Layer w0.25: v1@8.94,100.045 v1(9.013,99.972) C3.2 12.277,96.715 11.805,96.244 C2.1 11.805,88.648 C1.1 ; VD20.2 v1(79.818,34.867) ; 122.514,39.058 DD5.8 ; DD6.8 127.94,86.131 v1(127.945,86.136) ; R11.1 233.671,34.751 v1(233.671,37.25) 233.671,39.86 R10.1 ; R9.1 233.617,50.996 v1(233.617,53.657) R8.1
NetDA1_3: DA1.3 R15.2 | length 12.6
  Top Layer w0.25: DA1.3 160.345,95.447 167.449,102.551 R15.2
NetDA1_4: DA1.4 XT4.3 | length 116.3
  Top Layer w0.25: DA1.4 160.318,96.697 v1(163.489,99.867) ; v1(163.489,99.867) 163.504,99.883 v1(163.489,99.867)
  Bottom Layer w0.25: XT4.3 148.981,5.086 147.661,6.406 147.661,95.841 151.687,99.867 v1(163.489,99.867)
NetDA1_6: DA1.6 XT4.4 | length 105
  Top Layer w0.25: v1(151.967,99.192) 151.971,99.197 DA1.6
  Bottom Layer w0.25: XT4.4 150.621,4.719 150.621,6.781 150.671,6.831 150.671,69.942 148.161,72.451 148.161,95.387 v1(151.967,99.192)
NetDA1_10: DA1.10 R17.2 | length 25.9
  Top Layer w0.25: DA1.10 149.296,97.947 158.269,88.974 R17.2
NetDA1_11: DA1.11 XT4.1 | length 103.7
  Top Layer w0.25: v1(139.477,96.704) 146.083,96.704 DA1.11
  Bottom Layer w0.25: v1(139.477,96.704) 139.477,4.233 139.891,3.819 XT4.1
NetDA1_13: DA1.13 XT4.2 | length 95.6
  Top Layer w0.25: v1@142.542,94.227 v1(142.572,94.197) DA1.13
  Bottom Layer w0.25: v1(142.572,94.197) 142.542,94.227 142.542,23.906 145.101,21.347 145.101,5.204 145.104,5.201 145.104,5.156 XT4.2
NetDA2_3: DA2.3 R19.2 | length 10.1
  Top Layer w0.25: DA2.3 162.251,74.252 163.132,75.132 R19.2
NetDA2_4: DA2.4 XT4.7 | length 79.4
  Top Layer w0.25: DA2.4 161.562,75.502 161.926,75.866 v1(163.862,75.866)
  Bottom Layer w0.25: XT4.7 160.306,4.984 160.306,10.65 163.862,14.206 v1(163.862,75.866)
NetDA2_6: DA2.6 XT4.8 | length 81.8
  Top Layer w0.25: DA2.6 158.606,78.018 v1(164.815,78.018)
  Bottom Layer w0.25: XT4.8 161.888,3.819 162.999,4.93 162.999,11.333 164.815,13.148 v1(164.815,78.018)
NetDA2_10: DA2.10 R21.2 | length 28.8
  Top Layer w0.25: DA2.10 149.306,76.752 165.182,60.876 R21.2
NetDA2_11: DA2.11 XT4.5 | length 77
  Top Layer w0.25: DA2.11 146.096,75.495 v1(149.475,75.495)
  Bottom Layer w0.25: v1(149.475,75.495) 150.831,74.14 150.831,72.706 153.161,70.376 153.161,5.986 154.061,5.086 XT4.5
NetDA2_13: DA2.13 XT4.6 | length 76.7
  Top Layer w0.25: DA2.13 146.106,72.986 v1(151.506,72.986)
  Bottom Layer w0.25: v1(151.506,72.986) 155.494,68.997 155.494,4.926 XT4.6
NetDA3_3: DA3.3 R23.2 | length 37.3
  Top Layer w0.25: v1(144.43,55.251) 146.581,55.251 DA3.3 ; v1(168.214,44.924) 168.292,45.003 R23.2
  Mid-Layer 1 w0.25: v1(144.43,55.251) 144.43,48.103 147.609,44.924 v1(168.214,44.924)
NetDA3_4: DA3.4 XT4.11 | length 51.7
  Top Layer w0.25: v1(143.687,53.994) 146.574,53.994 DA3.4
  Bottom Layer w0.25: v1(143.687,53.994) 143.687,48.051 146.441,45.297 XT4.11
NetDA3_6: DA3.6 XT4.12 | length 48.3
  Top Layer w0.25: DA3.6 149.527,51.51 v1(149.537,51.521)
  Bottom Layer w0.25: XT4.12 148.981,50.964 v1(149.537,51.521)
NetDA3_10: DA3.10 R25.2 | length 24.9
  Top Layer w0.25: DA3.10 161.211,52.76 162.094,51.877 162.094,38.544 166.458,34.18 R25.2
NetDA3_11: DA3.11 XT4.9 | length 59
  Top Layer w0.25: DA3.11 DA3.11 v1(166.324,54.012)
  Bottom Layer w0.25: XT4.9 165.43,3.819 166.32,4.709 166.32,54.007 v1(166.324,54.012)
NetDA3_13: DA3.13 XT4.10 | length 75
  Top Layer w0.25: v1(140.979,60.416) 150.58,60.416 154.486,56.51 DA3.13
  Bottom Layer w0.25: v1(140.979,60.416) 140.979,23.096 143.901,20.174 XT4.10
NetDA4_3: DA4.3 R27.2 | length 18.3
  Top Layer w0.25: DA4.3 160.934,31.861 165.595,27.2 165.595,20.767 166.085,20.277 R27.2
NetDA4_4: DA4.4 XT4.15 | length 34.2
  Top Layer w0.25: DA4.4 158.637,33.158 v1(162.762,33.158)
  Bottom Layer w0.25: XT4.15 157.742,6.359 158.04,6.657 158.04,9.449 162.762,14.172 v1(162.762,33.158)
NetDA4_6: DA4.6 XT4.16 | length 33.8
  Top Layer w0.25: DA4.6 156.571,35.611 154.795,33.835 154.795,22.474 159.141,18.128 XT4.16
NetDA4_10: DA4.10 R29.2 | length 44.8
  Top Layer w0.25: v1(143.451,34.358) 146.087,34.358 DA4.10 ; R29.2 168.292,5.408 v1(168.37,5.33)
  Mid-Layer 1 w0.25: v1(143.451,34.358) 165.646,12.164 165.646,8.055 v1(168.37,5.33)
NetDA4_11: DA4.11 XT4.13 | length 32.2
  Top Layer w0.25: DA4.11 149.65,33.111 149.662,33.099 v1(151.527,33.099)
  Bottom Layer w0.25: XT4.13 151.521,33.094 v1(151.527,33.099)
NetDA4_13: DA4.13 XT4.14 | length 30.8
  Top Layer w0.25: DA4.13@145.14,30.611 DA4.13 ; DA4.13@146.063,30.639 DA4.13 ; XT4.14 154.061,26.565 150.014,30.611 DA4.13
NetDA5_2: DA5.2 R55.2 | length 7.6
  Top Layer w0.25: R55.2 24.784,47.811 25.18,47.415 DA5.2
NetDA5_3: DA5.3 DD4.14 | length 191.3
  Top Layer w0.25: DA5.3 v1(31.932,46.165) ; v1(204.447,37.923) 206.707,37.923 DD4.14
  Mid-Layer 1 w0.25: v1(31.932,46.165) 107.379,46.165 118.511,35.033 143.731,35.033 150.231,28.533 199.649,28.533 204.447,33.33 v1(204.447,37.923)
NetDA5_13: DA5.13 VD27.2 | length 19.9
  Top Layer w0.25: DA5.13 47.579,47.415 48.205,46.789 VD27.2
NetDA6_6: DA6.6 R57.2 VD25.2 XT3.33 | length 271.2
  Top Layer w0.25: DA6.6 v1(85.732,100.549) ; R57.2 v1(239.109,45.497) 241.643,45.497 245.112,48.967 251.597,48.967 252.497,48.067 XT3.33 ; VD25.2 239.233,16.031 v1(240.157,16.956)
  Bottom Layer w0.25: v1(85.732,100.549) 85.732,106.724 91.557,112.549 216.426,112.549 230.114,98.861 230.114,85.035 241.175,73.974 241.175,49.184 239.109,47.117 v1(239.109,45.497) 239.109,44.711 240.157,43.663 v1(240.157,16.956)
NetDD1_2: DD1.2 DD3.1 | length 21.5
  Top Layer w0.25: DD1.2 221.958,74.606 221.555,75.009 221.555,83.312 224.576,86.333 DD3.1
NetDD1_3: DD1.3 R6.2 XT3.5 | length 41
  Top Layer w0.25: DD1.3 224.358,75.869 v1(227.148,75.869) ; R6.2 v1(239.056,62.481) 239.962,62.481 245.867,68.387 XT3.5
  Bottom Layer w0.25: v1(227.148,75.869) 232.495,75.869 239.056,69.308 v1(239.056,62.481)
NetDD1_4: DD1.4 DD3.2 | length 22.2
  Top Layer w0.25: DD1.4 222.694,77.146 222.398,77.442 222.398,82.728 226.726,87.056 226.726,93.288 226.447,93.567 226.447,93.57 DD3.2
NetDD1_5: DD1.5 R7.2 XT3.7 | length 51.5
  Top Layer w0.25: DD1.5 228.147,78.416 ; R7.2 231.283,80.678 229.021,78.416 228.147,78.416 ; XT3.7 248.189,60.273 230.258,60.273 228.155,62.376 228.155,78.407 228.147,78.416
NetDD1_6: DD1.6 DD3.3 | length 22
  Top Layer w0.25: DD1.6 227.108,79.686 228.203,80.781 228.203,94.434 227.798,94.84 DD3.3
NetDD1_7: DD1.7 R8.2 XT3.9 | length 47.2
  Top Layer w0.25: DD1.7 v1@226.176,80.956 ; R8.2 v1(238.903,56.119) 249.116,56.119 XT3.9
  Bottom Layer w0.25: v1@226.176,80.956 v1(226.182,80.961) 226.182,70.047 238.903,57.325 v1(238.903,56.119)
NetDD1_9: DD1.9 R9.2 XT3.11 | length 57.1
  Top Layer w0.25: v1(217.253,82.226) DD1.9 ; R9.2 v1(238.476,50.98) 242.711,50.98 244.878,53.147 XT3.11
  Bottom Layer w0.25: v1(217.253,82.226) 217.253,82.238 v1(217.253,82.226) 217.261,82.001 217.261,72.195 v1(238.476,50.98)
NetDD1_10: DD1.10 DD3.4 | length 34.8
  Top Layer w0.25: v1(213.793,80.956) DD1.10 ; DD3.4 227.461,96.11 v1(227.495,96.076)
  Bottom Layer w0.25: v1(213.793,80.956) 213.746,81.003 213.746,91.976 217.845,96.076 v1(227.495,96.076)
NetDD1_11: DD1.11 R10.2 XT3.13 | length 69.1
  Top Layer w0.25: v1(216.441,79.631) 216.496,79.686 DD1.11 ; R10.2 v1(238.422,39.921) 243.078,39.921 XT3.13
  Bottom Layer w0.25: v1(216.441,79.631) 216.551,79.52 216.551,75.492 216.536,75.477 216.536,61.808 v1(238.422,39.921)
NetDD1_12: DD1.12 DD3.5 | length 41.8
  Top Layer w0.25: v1(212.176,78.416) DD1.12 ; DD3.5 224.423,97.452 v1(227.565,97.452)
  Bottom Layer w0.25: v1(212.176,78.416) 212.153,78.438 212.153,92.83 216.776,97.452 v1(227.565,97.452)
NetDD1_14: DD1.14 R11.2 XT3.15 | length 70.9
  Top Layer w0.25: v1(215.876,75.882) 215.91,75.848 218.923,75.848 DD1.14 ; v1(236.787,36.499) R11.2 242.904,34.667 XT3.15
  Bottom Layer w0.25: v1(215.876,75.882) 215.876,57.409 v1(236.787,36.499)
NetDD1_15: DD1.15 DD3.6 | length 47.7
  Top Layer w0.25: v1(214.314,74.606) DD1.15 ; DD3.6 224.394,98.693 v1(227.627,98.693)
  Bottom Layer w0.25: v1(214.314,74.606) 214.265,74.556 210.131,78.69 210.131,92.515 216.309,98.693 v1(227.627,98.693)
NetDD2_2: DD2.2 DD4.1 | length 13.6
  Top Layer w0.25: DD4.1 215.13,35.379 216.233,36.482 216.233,42.27 216.989,43.027 DD2.2
NetDD2_3: DD2.3 R12.2 XT3.17 | length 47.7
  Top Layer w0.25: v1(217.062,41.757) DD2.3 ; v1(236.892,29.767) 236.909,29.75 R12.2 241.029,27.712 XT3.17
  Bottom Layer w0.25: v1(217.062,41.757) 219.014,39.805 226.854,39.805 v1(236.892,29.767)
NetDD2_4: DD2.4 DD4.2 | length 10.7
  Top Layer w0.25: DD4.2 213.784,36.649 214.659,37.523 v1(214.659,40.502) ; v1(217.153,40.55) 219.337,40.55 DD2.4
  Bottom Layer w0.25: v1(214.659,40.502) 214.707,40.55 v1(217.153,40.55)
NetDD2_5: DD2.5 R13.2 XT3.19 | length 52.1
  Top Layer w0.25: v1(217.003,39.217) DD2.5 ; v1(236.945,19.154) 236.909,19.156 R13.2 239.773,21.377 XT3.19
  Bottom Layer w0.25: v1@217.003,39.216 217.003,39.097 v1(236.945,19.154) v1@236.909,19.156
NetDD2_6: DD2.6 XT3.6 | length 48.3
  Top Layer w0.25: v1(216.918,37.972) 219.376,37.972 DD2.6
  Mid-Layer 1 w0.25: v1(216.918,37.972) 223.349,37.972 XT3.6
NetDD2_10: DD2.10 XT3.8 | length 38.1
  Top Layer w0.25: DD2.10 224.806,36.681 v1(228.715,36.681)
  Mid-Layer 1 w0.25: v1(228.715,36.681) 228.715,39.545 230.489,41.318 231.775,41.318 XT3.8
NetDD2_12: DD2.12 XT3.10 | length 33.2
  Top Layer w0.25: DD2.12 224.801,39.213 v1(230.092,39.213)
  Mid-Layer 1 w0.25: v1(230.092,39.213) 230.118,39.239 234.776,39.239 XT3.10
NetDD2_15: DD2.15 XT3.12 | length 29.6
  Top Layer w0.25: DD2.15 228.289,43.027 232.747,47.485 241.909,47.485 245.031,50.607 XT3.12
NetDD3_11: DD3.11 R24.1 R25.1 SA9.2 | length 113.4
  Top Layer w0.25: R24.1 168.292,39.069 171.673,35.688 R25.1 196.53,34.18 196.935,34.586 SA9.2 196.92,36.33 v1(196.92,42.739) ; v1(207.5,98.639) 207.511,98.65 DD3.11
  Bottom Layer w0.25: v1(196.92,42.739) 204.235,50.054 204.235,95.374 v1(207.5,98.639)
NetDD3_12: DD3.12 R22.1 R23.1 SA8.2 | length 106.5
  Top Layer w0.25: R22.1 168.292,52.967 171.492,49.767 R23.1 171.666,47.556 196.935,47.556 ; SA8.2 196.935,47.556 ; v1(205.543,47.556) 196.935,47.556 ; v1(208.02,97.412) 208.053,97.38 DD3.12
  Bottom Layer w0.25: v1(205.543,47.556) 205.528,47.597 205.528,94.921 v1(208.02,97.412)
NetDD3_13: DD3.13 R20.1 R21.1 SA7.2 | length 95.9
  Top Layer w0.25: R20.1 168.292,66.833 171.492,63.633 R21.1 180.517,60.876 181.654,59.739 196.948,59.739 ; SA7.2 196.935,59.752 196.948,59.739 ; v1(206.966,59.739) 196.948,59.739 ; v1(208.642,96.053) 208.699,96.11 DD3.13
  Bottom Layer w0.25: v1(206.966,59.739) 206.966,94.377 v1(208.642,96.053)
NetDD3_14: DD3.14 R18.1 R19.1 SA6.2 | length 83.1
  Top Layer w0.25: R18.1 168.292,80.576 171.492,77.376 R19.1 178.853,75.132 181.565,72.421 196.983,72.421 ; SA6.2 196.935,72.469 196.983,72.421 ; v1(208.452,72.421) 196.983,72.421 ; v1(209.989,94.84) DD3.14
  Bottom Layer w0.25: v1@208.57,72.539 208.451,72.658 208.451,93.302 209.936,94.787 v1(209.989,94.84)
NetDD3_15: DD3.15 R16.1 R17.1 SA5.2 | length 71.8
  Top Layer w0.25: R16.1 168.292,94.044 171.492,90.844 R17.1 178.391,88.974 180.914,86.45 196.971,86.45 ; SA5.2 196.935,86.487 196.971,86.45 ; DD3.15 220.896,93.57 221.748,92.718 221.748,89.014 219.184,86.45 196.971,86.45
NetDD3_16: DD3.16 R14.1 R15.1 SA4.2 | length 65.8
  Top Layer w0.25: R14.1 168.292,107.922 171.492,104.722 R15.1 180.88,102.551 184.729,98.702 196.965,98.702 ; SA4.2 196.935,98.732 196.965,98.702 ; DD3.16 210.892,92.3 204.491,98.702 196.965,98.702
NetDD4_3: DD4.3 DD8.6 | length 30.6
  Top Layer w0.25: DD4.3 213.72,37.919 213.72,46.206 220.91,53.396 220.91,60.295 221.336,60.721 DD8.6
NetDD4_15: DD4.15 R28.1 R29.1 SA11.2 | length 75.4
  Top Layer w0.25: R28.1 168.292,11.205 169.124,10.373 170.437,10.373 171.492,9.318 R29.1 175.203,8.069 178.35,4.922 196.35,4.922 196.935,5.507 SA11.2 196.935,11.57 199.305,13.94 205.012,13.94 208.575,17.503 208.575,36.231 208.157,36.649 DD4.15
NetDD4_16: DD4.16 R26.1 R27.1 SA10.2 | length 54.6
  Top Layer w0.25: R26.1 168.292,25.26 171.492,22.06 R27.1 196.358,20.277 196.935,20.854 SA10.2 196.95,22.693 196.95,26.831 198.709,28.59 202.338,28.59 206.712,32.963 DD4.16
NetDD6_11: DD6.11 R48.2 П7.1 | length 103
  Top Layer w0.25: R48.2 117.325,83.622 ; 117.303,81.098 117.325,81.121 117.325,83.622 ; v1(118.555,12.841) 133.822,12.841 136.126,10.537 П7.1 ; DD6.11 119.433,82.735 118.546,83.622 117.325,83.622
  Bottom Layer w0.25: 117.325,81.121 117.303,81.098 117.303,39.202 117.99,38.514 117.99,13.405 v1(118.555,12.841)
NetDD6_14: DD6.14 R49.2 VD19.1 | length 83.9
  Top Layer w0.25: v1(62.206,32.488) 62.235,32.517 VD19.1 ; v1(111.788,73.488) 114.644,73.488 114.816,73.66 R49.2 117.177,76.856 119.247,78.925 DD6.14
  Bottom Layer w0.25: v1(62.206,32.488) 67.933,32.488 94.562,59.117 94.903,59.117 109.333,73.547 111.729,73.547 v1(111.788,73.488)
NetDD7_2: DD7.2 XT3.14 | length 42.9
  Top Layer w0.25: DD7.2 224.357,17.718 v1(226.79,17.718)
  Mid-Layer 1 w0.25: v1(226.79,17.718) 226.79,25.435 232.798,31.443 237.14,31.443 XT3.14
NetDD7_4: DD7.4 XT3.16 | length 35.2
  Top Layer w0.25: DD7.4 v1(227.872,20.251)
  Mid-Layer 1 w0.25: v1(227.872,20.251) 231.028,20.251 XT3.16
NetDD7_6: DD7.6 XT3.18 | length 32.1
  Top Layer w0.25: DD7.6 227.304,22.792 228.281,23.769 239.626,23.769 XT3.18
NetDD7_10: DD7.10 XT3.20 | length 46.2
  Top Layer w0.25: v1(216.54,23.991) 216.612,24.062 DD7.10
  Mid-Layer 1 w0.25: v1(216.54,23.991) 216.54,23.458 223.463,16.535 237.472,16.535 XT3.20
NetDD7_12: DD7.12 XT3.22 | length 85.1
  Top Layer w0.25: v1(213.093,21.577) 218.896,21.577 DD7.12
  Mid-Layer 1 w0.25: v1(213.093,21.577) 213.093,48.97 238.583,74.46 251.905,74.46 253.451,76.007 XT3.22
NetDD7_15: DD7.15 XT3.24 | length 79.1
  Top Layer w0.25: v1(215.444,17.705) 215.451,17.712 DD7.15
  Mid-Layer 1 w0.25: v1@215.451,17.712 v1(215.444,17.705) 215.444,43.669 241.242,69.468 252.304,69.468 XT3.24
NetDD8_2: DD8.2 XT3.26 | length 34.6
  Top Layer w0.25: DD8.2 224.376,55.616 v1(229.573,55.616)
  Mid-Layer 1 w0.25: v1(229.573,55.616) 240.997,67.04 252.571,67.04 XT3.26
NetDD8_4: DD8.4 XT3.28 | length 30.5
  Top Layer w0.25: DD8.4 249.905,58.181 250.851,59.127 252.124,59.127 XT3.28
NetDD8_7: DD8.7 R54.1 XT3.21 | length 46.8
  Top Layer w0.25: DD8.7 226.005,61.991 226.913,62.9 v1(226.913,65.092) ; R54.1 241.293,74.857 243.637,77.201 v1(245.133,77.201) 252.418,77.201 XT3.21
  Mid-Layer 1 w0.25: v1(226.913,65.092) 239.022,77.201 v1(245.133,77.201)
NETLABEL7: DD2.7 DD2.9 DD2.11 DD2.14 DD5.2 DD5.4 DD5.6 DD5.10 DD5.12 DD5.15 DD6.2 DD6.4 DD6.6 DD6.10 DD6.12 DD6.15 DD7.3 DD7.5 DD7.7 DD7.9 DD7.11 DD7.14 DD8.3 DD8.5 R38.1 R39.1 R40.1 R41.1 R42.1 R43.1 R44.1 R45.1 R50.1 R51.1 R52.1 R53.1 | length 376.3
  Top Layer w0.25: R53.1 R52.1 R51.1 R50.1 R45.1 ; R38.1 R39.1 R40.1 R41.1 R42.1 R43.1 R44.1 R45.1 ; DD5.4 125.011,45.619 ; DD5.2 123.347,48.159 124.152,47.354 124.985,47.354 ; DD6.15 123.994,77.655 124.403,78.064 125.013,78.064 ; DD6.12 124.999,81.465 125.013,81.45 ; DD6.10 125.013,84.005 125.013,81.45 ; 124.98,43.079 DD5.6 119.161,43.079 118.502,42.42 112.665,42.42 111.797,41.552 R45.1 ; 125.024,82.735 DD6.6 129.953,82.735 v1(129.997,82.779) ; 125.032,77.655 DD6.2 ; 125.038,48.159 DD5.15 ; 125.046,80.195 DD6.4 ; 125.063,44.349 DD5.12 ; DD5.10 125.013,41.809 125.013,78.064 ; DD7.14 221.478,18.982 ; DD7.11 221.454,22.792 221.478,22.816 ; DD7.9 221.459,25.332 221.478,25.351 ; DD2.7 221.402,36.677 221.478,36.601 ; 221.478,56.93 221.478,59.451 v1@221.584,59.451 ; 221.478,37.982 224.765,37.982 DD2.11 ; v1(221.586,59.453) v1@221.584,59.451 ; DD7.3 221.478,18.982 ; DD7.5 221.536,21.522 221.478,21.58 ; DD7.7 221.478,24.062 ; DD8.3 221.496,56.911 221.496,41.771 221.486,41.76 ; DD8.5 v1@221.584,59.451 ; DD2.9 221.499,35.407 221.478,35.386 ; 125.013,78.064 125.013,81.45 ; 221.478,18.982 221.478,21.58 ; 221.478,21.58 221.478,22.816 ; 221.478,22.816 221.478,24.062 ; 221.478,24.062 221.478,25.351 ; 221.478,25.351 221.478,35.386 ; 221.478,35.386 221.478,36.601 ; 221.478,36.601 221.478,37.982 221.478,41.76 221.486,41.76 ; 221.486,41.76 DD2.14 221.482,41.757 221.486,41.76
  Mid-Layer 1 w0.25: v1(129.997,82.779) 140.38,82.779 164.096,59.064 207.246,59.064 207.635,59.453 v1(221.586,59.453)
NetR1_2: R1.2 R5.1 VT1.1 | length 14
  Top Layer w0.25: VT1.1 47.198,69.89 48.151,68.937 R1.2 48.151,58.679 R5.1
NetR2_2: R2.2 VD1.1 | length 4.7
  Top Layer w0.25: VD1.1 22.475,24.9 R2.2
NetR4_2: R4.2 VD2.1 | length 4.8
  Top Layer w0.25: R4.2 18.788,72.126 VD2.1
NetR14_2: R14.2 VD3.2 | length 13.1
  Top Layer w0.25: R14.2 178.866,109.498 180.266,108.098 VD3.2
NetR16_2: R16.2 VD4.2 | length 12.9
  Top Layer w0.25: R16.2 178.632,95.772 180.266,94.137 VD4.2
NetR18_2: R18.2 VD5.2 | length 12.9
  Top Layer w0.25: R18.2 178.752,82.045 180.266,80.531 VD5.2
NetR20_2: R20.2 VD6.2 | length 12.5
  Top Layer w0.25: R20.2 178.167,68.319 180.266,66.22 VD6.2
NetR22_2: R22.2 VD7.2 | length 13
  Top Layer w0.25: R22.2 179.096,54.593 180.266,53.423 VD7.2
NetR24_2: R24.2 VD8.2 | length 13.2
  Top Layer w0.25: R24.2 179.621,40.868 180.266,40.223 VD8.2
NetR26_2: R26.2 VD9.2 | length 12.5
  Top Layer w0.25: R26.2 178.439,27.14 180.266,25.313 VD9.2
NetR28_2: R28.2 VD10.2 | length 13.2
  Top Layer w0.25: R28.2 179.887,13.414 180.266,13.036 VD10.2
NetR38_2: R38.2 VD11.1 | length 7.1
  Top Layer w0.25: VD11.1 97.282,106.35 97.58,106.051 R38.2
NetR39_2: R39.2 VD12.1 | length 7
  Top Layer w0.25: VD12.1 97.352,97.098 97.613,96.837 R39.2
NetR40_2: R40.2 VD13.1 | length 7
  Top Layer w0.25: VD13.1 96.975,87.847 97.199,87.623 R40.2
NetR41_2: R41.2 VD14.1 | length 7
  Top Layer w0.25: VD14.1 98.23,78.595 98.416,78.409 R41.2
NetR42_2: R42.2 VD15.1 | length 7
  Top Layer w0.25: VD15.1 101.279,69.344 R42.2
NetR43_2: R43.2 VD16.1 | length 7
  Top Layer w0.25: VD16.1 101.316,60.092 R43.2
NetR44_2: R44.2 VD17.1 | length 7
  Top Layer w0.25: VD17.1 101.353,50.841 R44.2
NetR45_2: R45.2 VD18.1 | length 6.9
  Top Layer w0.25: VD18.1 101.391,41.589 R45.2
NetR50_2: R50.2 VD21.1 | length 13.9
  Top Layer w0.25: VD21.1 R50.2 VD21.1
NetR51_2: R51.2 VD22.1 | length 6.9
  Top Layer w0.25: VD22.1 101.391,23.086 R51.2
NetR52_2: R52.2 VD23.1 | length 7
  Top Layer w0.25: VD23.1 101.354,13.835 R52.2
NetR53_2: R53.2 VD24.1 | length 6.8
  Top Layer w0.25: VD24.1 R53.2@101.317,4.583
NetR56_2: R56.2 R58.1 VD26.2 XT3.35 | length 181.4
  Top Layer w0.25: R56.2 154.764,107.795 159.247,112.278 231.492,112.278 235.195,108.575 VD26.2@235.195,93.563 ; v1(235.195,90.028) VD26.2@235.195,93.563 ; VD26.2 VD26.2@235.195,93.563 ; R58.1 242.367,67.701 v1(242.648,67.982)
  Bottom Layer w0.25: v1(235.195,90.028) 235.195,82.296 242.648,74.842 v1(242.648,67.982) 242.648,49.115 247.876,43.887 251.597,43.887 252.497,42.987 XT3.35
КПС-1: VD19.2 XT2.1 XT2.2 XT2.3 XT2.4 XT2.5 П5.1 | length 57.6
  Top Layer w0.25: XT2.1 XT2.2 XT2.3 XT2.4 XT2.5 57.153,3.829 58.398,5.074 v1(58.398,7.969) ; v1(53.016,31.91) 55.973,34.867 VD19.2
  Bottom Layer w0.25: v1(53.016,31.91) 53.016,16.85 55.549,14.318 П5.1@58.398,14.318 ; v1(58.398,7.969) П5.1@58.398,14.318 ; П5.1 П5.1@58.398,14.318
КПС-2: VD20.1 XT2.6 XT2.7 XT2.8 XT2.9 XT2.10 П6.1 | length 71.3
  Top Layer w0.25: v1(68.931,32.19) 71.608,34.867 VD20.1
  Bottom Layer w0.25: XT2.6 XT2.7 XT2.8 XT2.9 XT2.10 74.36,6.369 74.694,6.704 П6.1 71.343,14.51 68.931,16.922 v1(68.931,32.19)
ТМ1: DD5.3 R30.2 XT5.1 | length 63.9
  Top Layer w0.25: v1(109.03,48.544) 109.052,48.566 114.921,48.566 ; R30.2 114.938,48.583 114.921,48.566 ; DD5.3 120.196,46.889 118.519,48.566 114.921,48.566
  Bottom Layer w0.25: v1(109.03,48.544) 107.802,47.315 107.802,7.461 XT5.1
ТМ2: DD5.5 R31.2 XT5.2 | length 57.9
  Top Layer w0.25: v1(109.432,42.92) 114.965,42.92 ; R31.2 114.938,42.947 114.965,42.92 ; DD5.5 119.724,44.349 118.295,42.92 114.965,42.92
  Bottom Layer w0.25: v1(109.432,42.92) 108.713,42.201 108.713,7.818 110.962,5.568 112.235,5.568 XT5.2
ТМ3: DD5.7 R32.2 XT5.3 | length 43.7
  Top Layer w0.25: R32.2 117.31,38.24 v1(117.315,38.235) 120.889,41.809 DD5.7
  Bottom Layer w0.25: XT5.3 116.415,5.195 117.315,6.095 v1(117.315,38.235)
ТМ4: DD5.9 R33.2 XT5.4 | length 48.5
  Top Layer w0.25: R33.2 114.977,31.475 v1(120.046,31.475) 125.324,31.475 127.914,34.065 DD5.9
  Bottom Layer w0.25: XT5.4 120.046,5.019 v1(120.046,31.475)
ТМ5: DD5.11 R34.2 XT5.5 | length 57.4
  Top Layer w0.25: R34.2 138.671,43.843 138.245,44.269 132.853,44.269 131.663,43.079 v1(129.898,43.079) ; v1(129.898,43.079) DD5.11 v1(129.898,43.079)
  Bottom Layer w0.25: XT5.5 123.06,5.493 123.06,8.863 129.898,15.7 v1(129.898,43.079)
ТМ6: DD5.14 R35.2 XT5.6 | length 58.1
  Top Layer w0.25: DD5.14 127.921,46.882 v1@130.854,46.882 ; v1(130.837,46.865) v1@130.854,46.882 ; R35.2 138.671,47.166 138.387,46.882 v1@130.854,46.882
  Bottom Layer w0.25: XT5.6 125.675,5.568 125.675,6.871 125.705,6.901 125.705,9.152 130.837,14.284 v1(130.837,46.865)
ТМ7: DD6.3 R36.2 XT5.7 | length 87.9
  Top Layer w0.25: DD6.3 132.031,78.925 132.753,78.203 v1(132.753,73.657) 135.158,73.657 135.517,73.298 R36.2
  Bottom Layer w0.25: XT5.7 128.215,5.568 129.488,5.568 132.491,8.571 132.491,72.45 132.753,72.712 v1(132.753,73.657)
ТМ8: DD6.5 R37.2 XT5.8 | length 98.2
  Top Layer w0.25: R37.2 135.517,80.702 134.764,81.454 v1@133.947,81.454 ; v1(133.866,81.466) v1@133.936,81.465 ; v1(133.866,81.466) DD6.5 DD6.5 v1@133.874,81.465 ; v1(133.866,81.466) v1@133.874,81.465 ; v1@133.874,81.465 v1@133.936,81.465 ; v1@133.874,81.465 v1@133.947,81.454 ; v1@133.936,81.465 v1@133.947,81.454
  Bottom Layer w0.25: XT5.8 132.018,3.928 133.866,5.776 v1(133.866,81.466)
ТМ9: DD6.7 R46.2 XT5.9 | length 114.3
  Top Layer w0.25: v1(127.772,91.195) 127.823,91.246 129.312,91.246 130.123,90.435 130.123,84.005 ; DD6.7 130.123,84.005 ; R46.2 135.281,84.005 130.123,84.005
  Bottom Layer w0.25: XT5.9 111.335,68.704 113.375,70.744 113.375,86.974 117.596,91.195 v1(127.772,91.195)
ТМ10: DD6.9 R47.2 XT5.10 | length 97.6
  Top Layer w0.25: R47.2 117.744,90.388 v1(117.876,90.52) 120.639,90.52 122.54,88.619 DD6.9
  Bottom Layer w0.25: XT5.10 113.875,86.519 v1(117.876,90.52)
pads on no net: DA1.1 DA1.5 DA1.7 DA1.8 DA1.12 DA1.14 DA2.1 DA2.5 DA2.7 DA2.8 DA2.12 DA2.14 DA3.1 DA3.5 DA3.7 DA3.8 DA3.12 DA3.14 DA4.1 DA4.5 DA4.7 DA4.8 DA4.12 DA4.14 DA5.1 DA5.4 DA5.5 DA5.6 DA5.7 DA5.8 DA5.9 DA5.10 DA5.12 DA5.14 DA6.3 DA6.4 DA6.7 DD1.13 DD1.16 DD2.13 DD2.16 DD3.7 DD3.9 DD3.10 DD4.4 DD4.5 DD4.6 DD4.7 DD4.9 DD4.10 DD4.11 DD4.12 DD4.13 DD5.13 DD5.16 DD6.13 DD6.16 DD7.13 DD7.16 DD8.9 DD8.10 DD8.11 DD8.12 DD8.13 DD8.14 DD8.15 DD8.16 SA1.1 SA2.3 SA3.1 SA4.1 SA5.1 SA6.1 SA7.1 SA8.1 SA9.1 SA10.1 SA11.1 XT3.23 XT3.25 XT3.27 XT3.37 XT3.38 XT4.17 XT4.18 XT5.11 XT5.12 XT5.13 XT5.14 XT5.15 XT5.16 П1.2 П2.2 П3.2 П4.2 П5.2 П6.2
copper on no net:
  other v1: 215.118,82.648

## Polygon pours and split planes (outlines as drawn)
GND on Internal Plane 1 (split plane): 256.79,0.51 0.51,0.51 0.51,114.29 256.79,114.29

## Keep-outs
Keep-Out Layer:
  region: 2.495,7.5 7.494,7.5 7.494,2.493 2.51,2.493 2.502,2.501
  region: 2.49,112.388 7.489,112.388 7.489,107.382 2.505,107.382 2.497,107.389
  region: 249.766,112.281 254.765,112.281 254.765,107.274 249.781,107.274 249.773,107.282
  region: 249.798,7.505 254.798,7.505 254.798,2.498 249.814,2.498 249.806,2.505
  region: 126.196,59.878 131.195,59.878 131.195,54.871 126.211,54.871 126.203,54.878
  lines w0.254: 0.001,114.799 0.002,114.8 ; 257.294,0 257.3,0.006
  lines w1.2: 0,0 257.294,0 ; 0.001,0.002 0.001,114.799 ; 0.002,114.8 257.3,114.8 257.3,0.006

## Silkscreen, mask and mechanical layers (free items; w line width, h text height)
Mechanical 1:
  lines w0.5: 6.266,50.497 6.266,53.037